# Altium PCB PCB1.PcbDoc
Units mm, origin at the board's own origin, x right, y up, seen from the top; angles counter-clockwise.
Board outline 76.2 x 24.77 mm, 2 copper layers (Top Layer, Bottom Layer); 20 components, 159 nets, 84 pads, 6 vias.
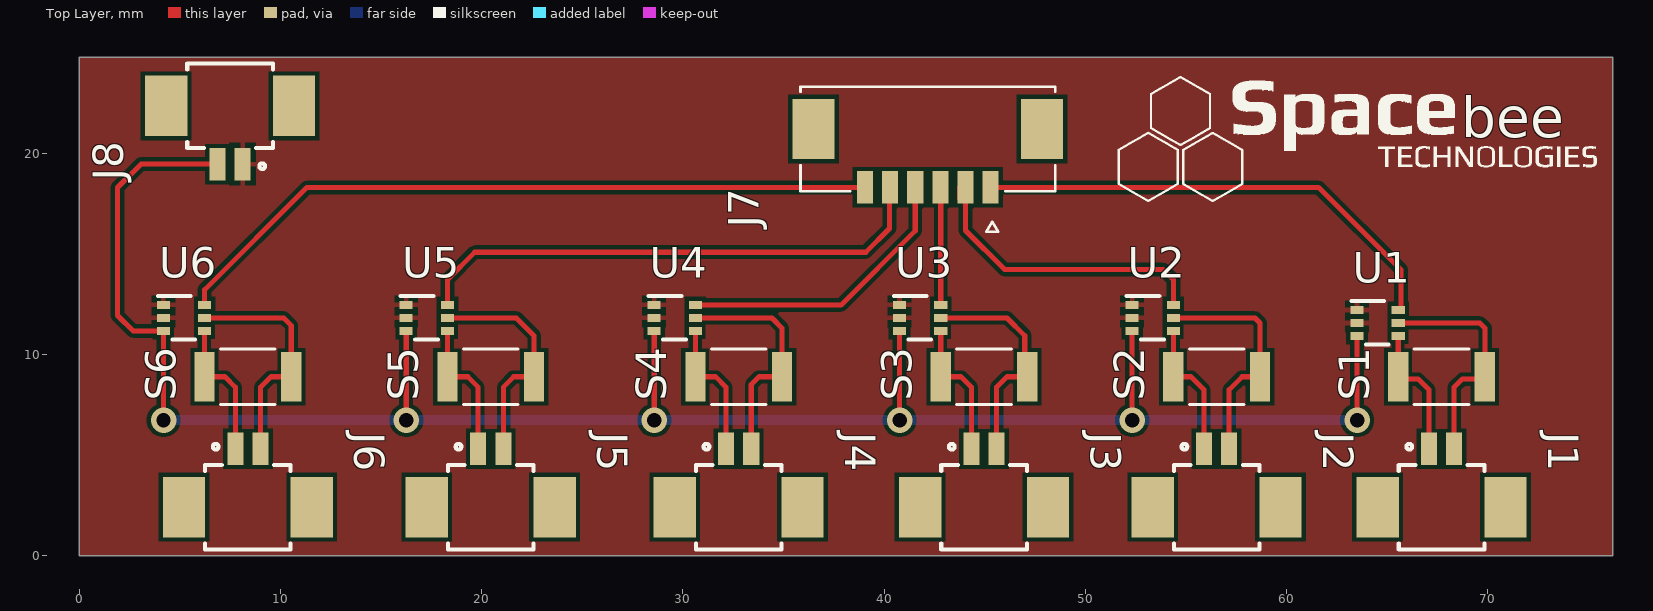
[diagram p0: Top Layer view]
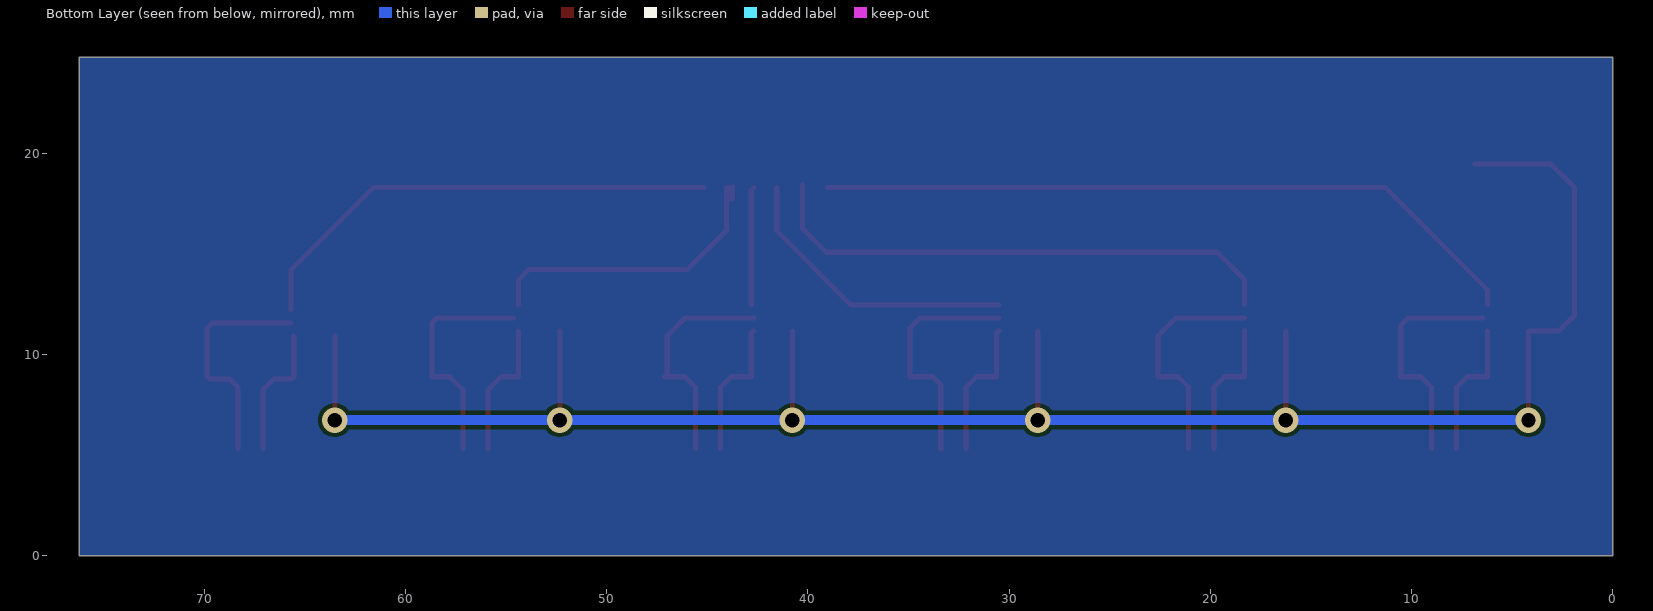
[diagram p1: Bottom Layer view, seen from below]
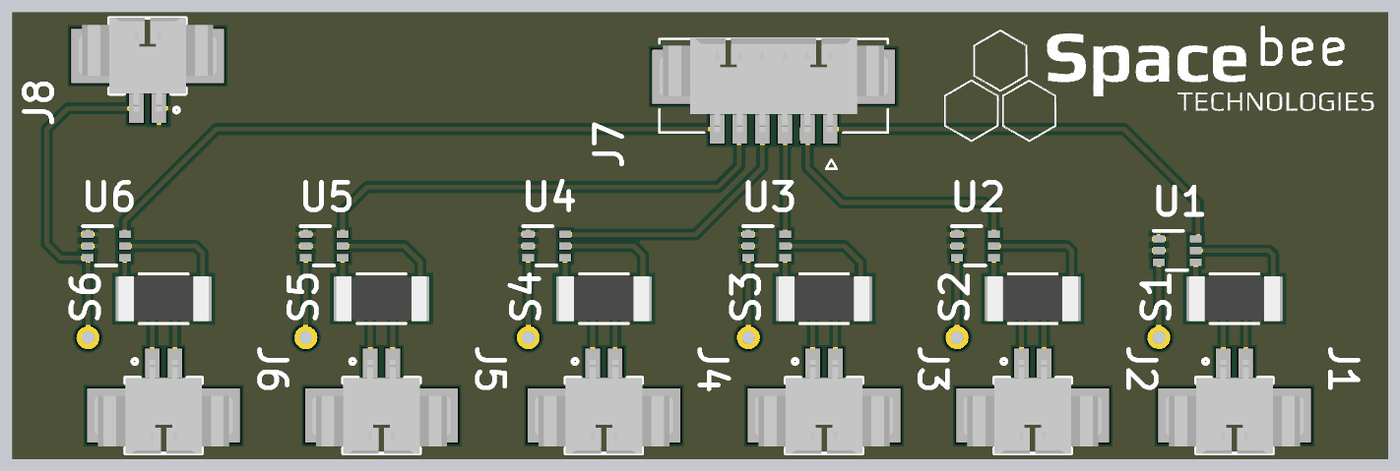
[diagram p2: 3D render of the assembled board from above, using the file's embedded part models]

## Layer stack, top to bottom
Top Solder: solder mask 0.0102, Solder Resist, Dk 3.5
Top Layer: signal copper 0.0356
Dielectric 1: dielectric 0.32, FR-4, Dk 4.8
Bottom Layer: signal copper 0.0356
Bottom Solder: solder mask 0.0102, Solder Resist, Dk 3.5

## Board outline
0,0 0,24.765 76.2,24.765 76.2,0

## Design rules (kind name [scope] priority, off if disabled: settings)
Clearance [All] p1: gap=0.2 ignorepadtopadclearanceinfootprint=FALSE
DiffPairsRouting [All] p1: maxlimit=0.254 minlimit=0.254 mostfreqgap=0.254 toplayer_minwidth=0.381 toplayer_maxwidth=0.381 toplayer_prefwidth=0.381 bottomlayer_minwidth=0.381 bottomlayer_maxwidth=0.381 bottomlayer_prefwidth=0.381 maxuncoupledlength=12.7
PolygonConnect [All] p1: connectstyle=Relief reliefconductorwidth=0.254 reliefentries=4 polygonreliefangle="90 Angle" airgapwidth=0.254
RoomDefinition CurrentMeasurement [InComponentClass('CurrentMeasurement')] p1: confinementstyle=ConfineIn formatcopy=TRUE lockcomponents=FALSE outline 0,0 76.2,0 76.2,24.765 0,24.765
RoutingVias [All] p1: holewidth=0.711 width=1.27 viastyle="Through Hole" minholewidth=0.711 minwidth=1.27 maxholewidth=0.711 maxwidth=1.27
SolderMaskExpansion [All] p1: expansion=0.102 istentingtop=FALSE
Width [All] p1: maxlimit=0.5 minlimit=0.254 preferedwidth=0.254 toplayer_maxwidth=0.254 minimp=50.000000 maximp=50.000000 favimp=50.000000
29 further rules are at their usual default settings.

## Classes and differential pairs
differential pair D: +D_P -D_N

## Components (designator, comment, footprint, x,y, rotation, side; value= is the part's Value field where it differs from the comment)
J1 "TSW102" MOLEX_53261-0271 67.691,2.413 r0 top
J2 "TSW102" MOLEX_53261-0271 56.515,2.413 r0 top
J3 "TSW102" MOLEX_53261-0271 44.958,2.413 r0 top
J4 "TSW102" MOLEX_53261-0271 32.766,2.413 r0 top
J5 "TSW102" MOLEX_53261-0271 20.447,2.413 r0 top
J6 "TSW102" MOLEX_53261-0271 8.382,2.413 r0 top
J7 "532610671" MOLEX_532610671 42.164,20.701 r180 top
J8 "TSW102" MOLEX_53261-0271 7.493,22.352 r180 top
S1 "WSL2010R2000FEA18" RC2010N_VIS-L 67.691,8.89 r180 top
S2 "WSL2010R2000FEA18" RC2010N_VIS-L 56.515,8.89 r180 top
S3 "WSL2010R2000FEA18" RC2010N_VIS-L 44.958,8.89 r180 top
S4 "WSL2010R2000FEA18" RC2010N_VIS-L 32.766,8.89 r180 top
S5 "WSL2010R2000FEA18" RC2010N_VIS-L 20.447,8.89 r180 top
S6 "WSL2010R2000FEA18" RC2010N_VIS-L 8.382,8.89 r180 top
U1 "INA210BQDCKRQ1" INA210BQDCKRQ1 64.516,11.557 r0 top
U2 "INA210BQDCKRQ1" INA210BQDCKRQ1 53.34,11.811 r0 top
U3 "INA210BQDCKRQ1" INA210BQDCKRQ1 41.783,11.811 r0 top
U4 "INA210BQDCKRQ1" INA210BQDCKRQ1 29.591,11.811 r0 top
U5 "INA210BQDCKRQ1" INA210BQDCKRQ1 17.272,11.811 r0 top
U6 "INA210BQDCKRQ1" INA210BQDCKRQ1 5.207,11.811 r0 top

## Footprints (in the part's own frame and the unit in brackets; to place one, negate y for a bottom-side part, rotate by r counter-clockwise, add the part's x,y. Pads: shape width x height; smd on the part's side, far side on the other; paste and mask are expansions set on the pad)
INA210BQDCKRQ1 [mm]
  rect 0.65x0.4 smd paste+0 mask+0.051: 1(-1.025,0.65) 2(-1.025,0) 3(-1.025,-0.65) 4(1.025,-0.65) 5(1.025,0) 6(1.025,0.65)
  silkscreen extent -1.3,-1.07 0.55,1.1, body extent -0.64,-1.02 0.64,1.02, height 1.1
MOLEX_53261-0271 [mm]
  rect 0.8x1.6 smd: 1(-0.625,2.9) 2(0.625,2.9)
  rect 2.1x3 smd: P1(-3.175,0) P2(3.175,0)
  silkscreen extent -2.12,-2.1 2.12,3.14, body extent -3.82,-2.12 3.83,3.08, height 3.23
MOLEX_532610671 [mm]
  rect 0.8x1.6 smd mask+0: 1(-3.125,2.4) 2(-1.875,2.4) 3(-0.625,2.4) 4(0.625,2.4) 5(1.875,2.4) 6(3.125,2.4)
  rect 2.1x3 smd mask+0: S1(-5.675,-0.5) S2(5.675,-0.5)
  silkscreen extent -6.32,-2.6 6.32,4.6, body extent -6.32,-2.63 6.32,2.57, height 3.38
RC2010N_VIS-L [mm]
  rect 1.002x2.449 smd paste+0 mask+0: 1(-2.151,0) 2(2.151,0)
  silkscreen extent -1.35,-1.38 1.35,1.38, body extent -2.5,-1.25 2.5,1.25, height 0.71

## Part data
S1 S2 S3 S4 S5 S6: "No Description Available", Mfr_Name=Vishay, Copyright="Copyright (C) 2022 Ultra Librarian. All rights reserved.", Manufacturer_Part_Number=WSL2010R2000FEA18, RefDes=RefDes, Type=DEV
U1 U2 U3 U4 U5 U6: Part Number=296-44263-2-ND
J7: LatestRevisionDate=17-Jul-2002, LatestRevisionNote="Re-released for DXP Platform.", Publisher="Altium Limited"

## Via types
v1: diameter 1.27, hole 0.711, Top Layer to Bottom Layer, 6 vias

## Nets (pads, with @x,y where several pads share a name; then routed paths per layer and width w, separated by ;. In a path a pad name is that pad's centre, name@x,y a point inside that pad or via, vN(x,y) a via of type N, cw(c..) or ccw(c..) an arc to the next point about the centre after c; other vN are vias at no path point)
+5V_1: 
+5V_2: 
+5V_3: 
+5V_4: 
+5V_5: 
+5V_6: 
C_USB_DM_1: 
C_USB_DM_2: 
C_USB_DM_3: 
C_USB_DM_4: 
C_USB_DM_5: 
C_USB_DM_6: 
C_USB_DP_1: 
C_USB_DP_2: 
C_USB_DP_3: 
C_USB_DP_4: 
C_USB_DP_5: 
C_USB_DP_6: 
C_USB_VBUS_1: 
C_USB_VBUS_2: 
C_USB_VBUS_3: 
C_USB_VBUS_4: 
C_USB_VBUS_5: 
C_USB_VBUS_6: 
Ch_A\_1: 
Ch_A\_2: 
Ch_A\_3: 
Ch_A\_4: 
Ch_A\_5: 
Ch_A\_6: 
Ch_A_1: 
Ch_A_2: 
Ch_A_3: 
Ch_A_4: 
Ch_A_5: 
Ch_A_6: 
Ch_B\_1: 
Ch_B\_2: 
Ch_B\_3: 
Ch_B\_4: 
Ch_B\_5: 
Ch_B\_6: 
Ch_B_1: 
Ch_B_2: 
Ch_B_3: 
Ch_B_4: 
Ch_B_5: 
Ch_B_6: 
Ch_I\_1: 
Ch_I\_2: 
Ch_I\_3: 
Ch_I\_4: 
Ch_I\_5: 
Ch_I\_6: 
Ch_I_1: 
Ch_I_2: 
Ch_I_3: 
Ch_I_4: 
Ch_I_5: 
Ch_I_6: 
CLOCK_1: 
CLOCK_2: 
CLOCK_3: 
CLOCK_4: 
CLOCK_5: 
CLOCK_6: 
D_N: 
D_P: 
DATA_1: 
DATA_2: 
DATA_3: 
DATA_4: 
DATA_5: 
DATA_6: 
GND: J8.1 U1.1 U1.2 U2.1 U2.2 U3.1 U3.2 U4.1 U4.2 U5.1 U5.2 U6.1 U6.2
"Motor_1 (-M)_1": 
"Motor_1 (-M)_2": 
"Motor_1 (-M)_3": 
"Motor_1 (-M)_4": 
"Motor_1 (-M)_5": 
"Motor_1 (-M)_6": 
"Motor_1 (M+)_1": 
"Motor_1 (M+)_2": 
"Motor_1 (M+)_3": 
"Motor_1 (M+)_4": 
"Motor_1 (M+)_5": 
"Motor_1 (M+)_6": 
NetC4_1: 
NetC4_2: 
NetC8_1: 
NetC8_2: 
NetC12_1: 
NetC12_2: 
NetC17_1: 
NetC17_2: 
NetC21_1: 
NetC21_2: 
NetC25_1: 
NetC25_2: 
NetF1_1: 
NetF3_1: 
NetJ1_1: J1.1 S1.2 U1.4 | length 6.7
  Top Layer w0.254: U1.4 65.541,8.891 S1.2 65.646,8.784 66.527,8.784 67.066,8.245 J1.1
NetJ1_2: J1.2 S1.1 U1.5 | length 11.5
  Top Layer w0.254: U1.5@65.668,11.557 69.596,11.557 69.842,11.311 S1.1 69.736,8.784 68.728,8.784 68.316,8.372 J1.2
NetJ2_1: J2.1 S2.2 U2.4 | length 7
  Top Layer w0.254: U2.4@54.364,11.16 S2.2 55.245,8.89 55.89,8.245 J2.1
NetJ2_2: J2.2 S2.1 U2.5 | length 11.5
  Top Layer w0.254: U2.5@54.619,11.811 58.42,11.811 58.666,11.565 S2.1 57.785,8.89 57.14,8.245 J2.2
NetJ3_1: J3.1 S3.2 U3.4 | length 7.2
  Top Layer w0.254: U3.4@42.681,11.161 42.734,11.161 42.807,11.088 S3.2 43.815,8.89 44.333,8.372 J3.1
NetJ3_2: J3.2 S3.1 U3.5 | length 11.5
  Top Layer w0.254: U3.5@42.681,11.811 46.101,11.811 46.982,10.93 S3.1@46.982,8.89 ; J3.2 45.583,8.372 46.101,8.89 S3.1
NetJ4_1: J4.1 S4.2 U4.4 | length 7.2
  Top Layer w0.254: U4.4@30.489,11.161 30.542,11.161 30.615,11.088 S4.2 31.623,8.89 32.141,8.372 J4.1
NetJ4_2: J4.2 S4.1 U4.5 | length 11.9
  Top Layer w0.254: U4.5@30.489,11.811 34.417,11.811 34.925,11.303 34.925,8.898 S4.1 33.782,8.89 33.391,8.499 J4.2
NetJ5_1: J5.1 S5.2 U5.4 | length 7.1
  Top Layer w0.254: U5.4@18.296,11.176 S5.2 19.304,8.89 19.822,8.372 J5.1
NetJ5_2: J5.2 S5.1 U5.5 | length 11.5
  Top Layer w0.254: U5.5 21.717,11.811 22.598,10.93 S5.1 21.59,8.89 21.072,8.372 J5.2
NetJ6_1: J6.1 S6.2 U6.4 | length 7.1
  Top Layer w0.254: U6.4@6.231,11.16 S6.2 7.239,8.89 7.757,8.372 J6.1
NetJ6_2: J6.2 S6.1 U6.5 | length 11.5
  Top Layer w0.254: U6.5@6.486,11.811 10.16,11.811 10.533,11.438 S6.1 9.525,8.89 9.007,8.372 J6.2
NetJ9_34: 
NetJ9_36: 
NetJ9_38: 
NetJ9_40: 
NetJ9_42: 
NetJ9_44: 
NetJ10_34: 
NetJ10_36: 
NetJ10_38: 
NetJ10_40: 
NetJ10_42: 
NetJ10_44: 
NetJ11_34: 
NetJ11_36: 
NetJ11_38: 
NetJ11_40: 
NetJ11_42: 
NetJ11_44: 
NetJ13_34: 
NetJ13_36: 
NetJ13_38: 
NetJ13_40: 
NetJ13_42: 
NetJ13_44: 
NetJ14_34: 
NetJ14_36: 
NetJ14_38: 
NetJ14_40: 
NetJ14_42: 
NetJ14_44: 
NetJ15_34: 
NetJ15_36: 
NetJ15_38: 
NetJ15_40: 
NetJ15_42: 
NetJ15_44: 
Shunt_Out1: J7.1 U1.6 | length 24.2
  Top Layer w0.254: J7.1@45.162,18.301 61.582,18.301 65.668,14.215 U1.6@65.668,12.207
Shunt_Out2: J7.2 U2.6 | length 16
  Top Layer w0.254: J7.2@43.731,18.336 43.731,17.72 J7.2@43.85,17.72 ; J7.2@43.912,17.72 J7.2@43.912,18.301 ; J7.2 44.039,16.159 45.974,14.224 53.848,14.224 54.365,13.707 U2.6
Shunt_Out3: J7.3 U3.6 | length 5.9
  Top Layer w0.254: J7.3@42.662,18.301 42.808,18.155 U3.6
Shunt_Out4: J7.4 U4.6 | length 14.7
  Top Layer w0.254: U4.6@30.489,12.461 30.504,12.446 37.846,12.446 41.539,16.139 J7.4
Shunt_Out5: J7.5 U5.6 | length 26.4
  Top Layer w0.254: U5.6 18.297,13.725 19.649,15.077 39.08,15.077 40.259,16.256 J7.5@40.259,18.428
Shunt_Out6: J7.6 U6.6 | length 35.7
  Top Layer w0.254: U6.6 6.232,13.217 11.316,18.301 J7.6
Supply1: 
Supply2: 
Supply3: 
VCC_+5V: J8.2 U1.3 U2.3 U3.3 U4.3 U5.3 U6.3 | length 100.1
  Top Layer w0.254: v1(4.191,6.731) 4.182,6.74 U6.3 2.682,11.161 1.905,11.938 1.905,18.288 3.069,19.452 J8.2 ; U5.3 16.247,6.74 v1(16.256,6.731) ; U4.3 28.571,11.157 28.571,6.735 v1(28.575,6.731) ; U3.3 40.762,11.157 40.762,6.736 v1(40.767,6.731) ; U2.3 52.319,11.157 52.319,6.736 v1(52.324,6.731) ; U1.3 63.495,10.903 63.495,6.736 v1(63.5,6.731)
  Bottom Layer w0.5: v1(4.191,6.731) v1(16.256,6.731) v1(28.575,6.731) v1(40.767,6.731) v1(52.324,6.731) v1(63.5,6.731)
pads on no net: J1.P1 J1.P2 J2.P1 J2.P2 J3.P1 J3.P2 J4.P1 J4.P2 J5.P1 J5.P2 J6.P1 J6.P2 J7.S1 J7.S2 J8.P1 J8.P2

## Polygon pours and split planes (outlines as drawn)
GND on Top Layer "GND_L01_P000" (solid, pour order 0): 0,0 0,24.765 76.2,24.765 76.2,0
no net on Bottom Layer "NONET_L02_P001" (solid, pour order 1): 0,0 0,24.765 76.2,24.765 76.2,0

## Silkscreen, mask and mechanical layers (free items; w line width, h text height)
Top Overlay:
  drawing of 20 lines, arcs and shapes, not listed
  text "bee" at 68.675,20.778 h2